# Altium PCB Layout.PcbDoc
Units mil, origin at the board's own origin, x right, y up, seen from the top; angles counter-clockwise.
Board outline 2700 x 2520 mil, 2 copper layers (Top Layer, Bottom Layer); 34 components, 28 nets, 132 pads, 10 vias.
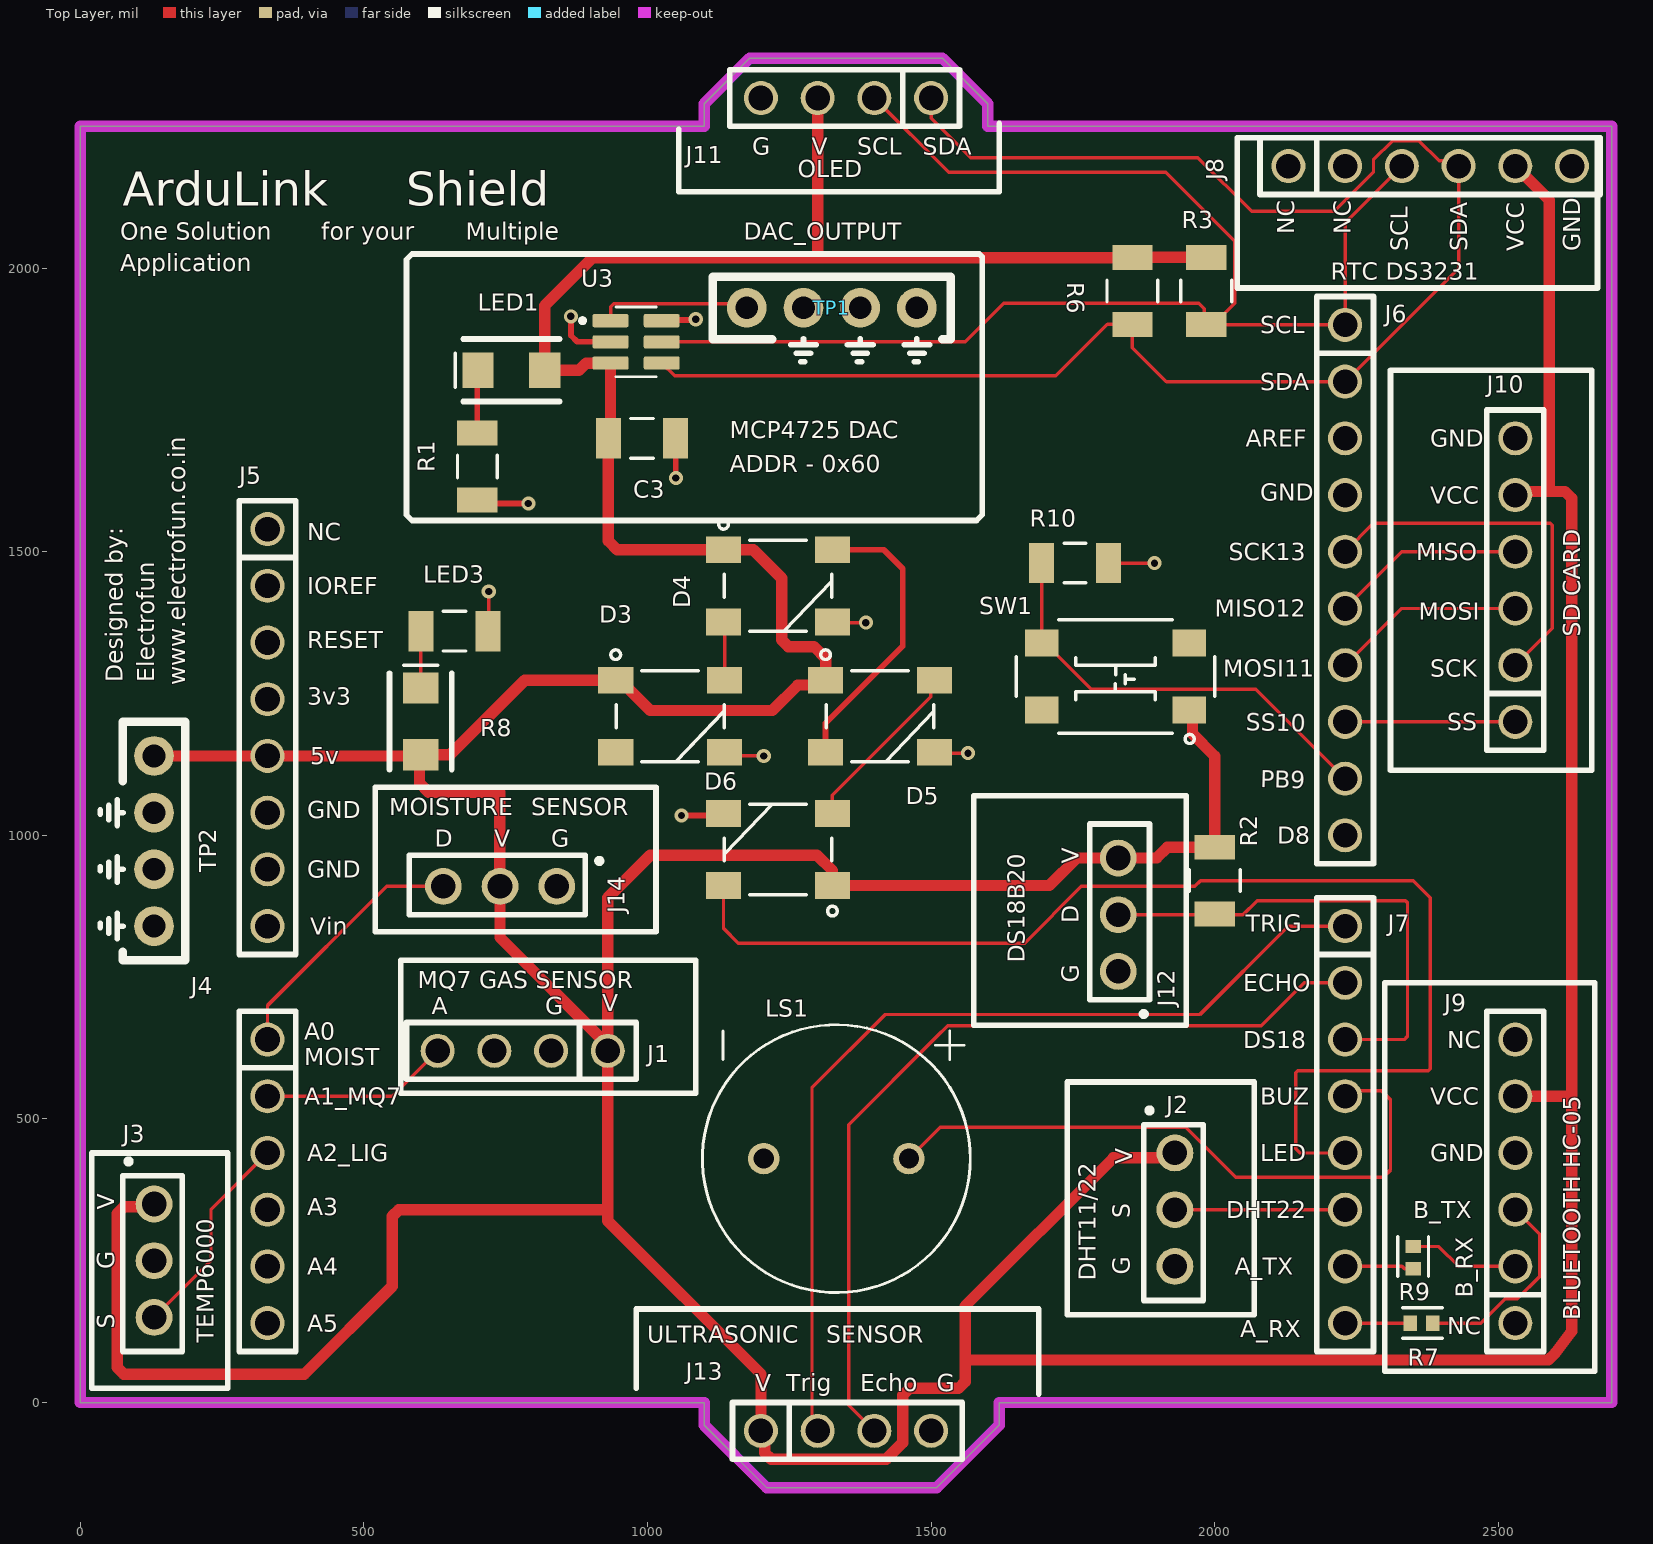
[diagram p0: Top Layer view]
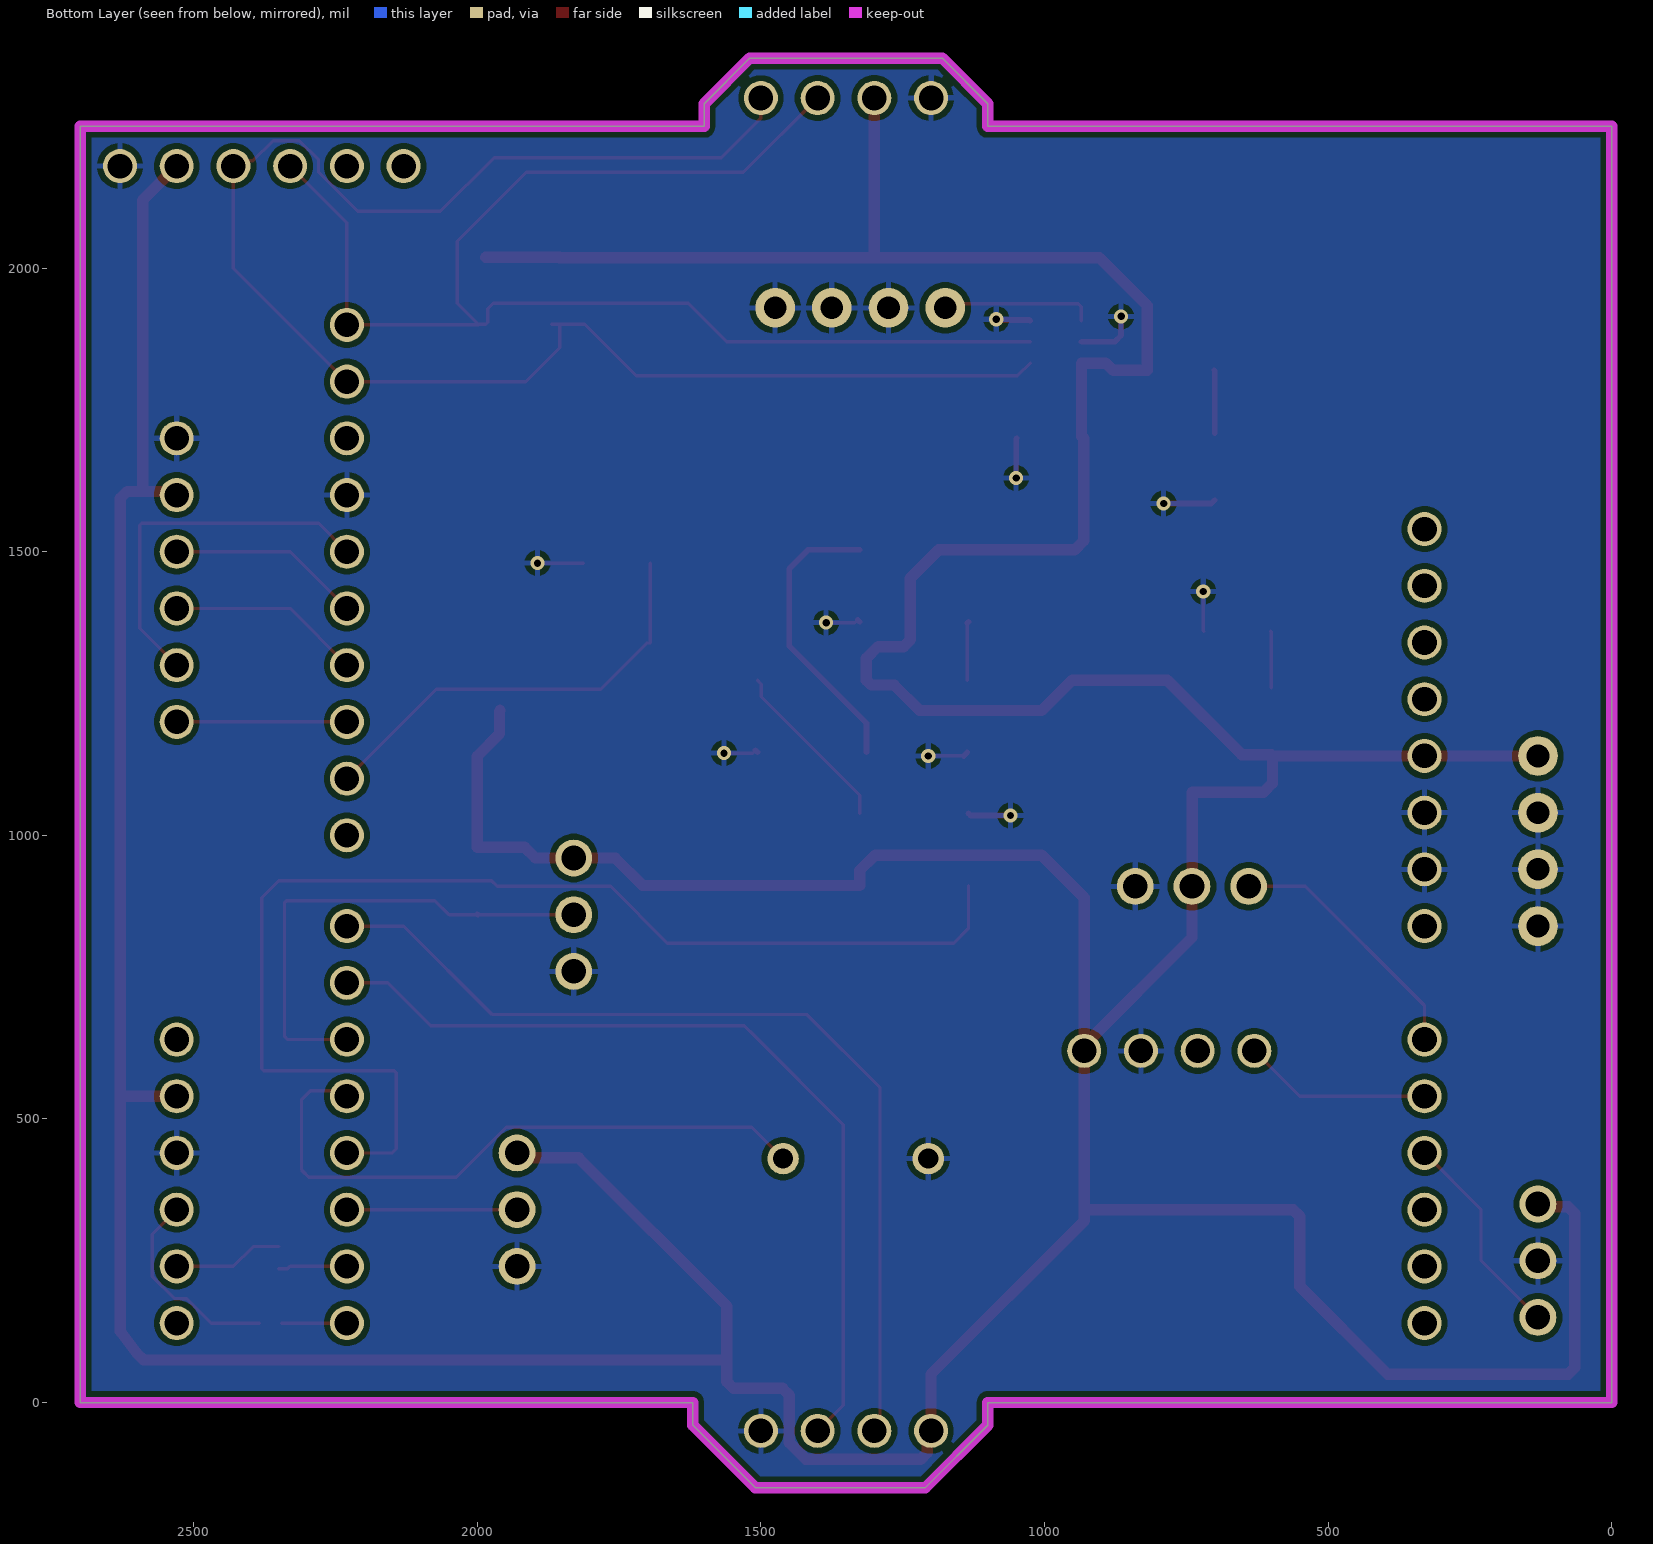
[diagram p1: Bottom Layer view, seen from below]
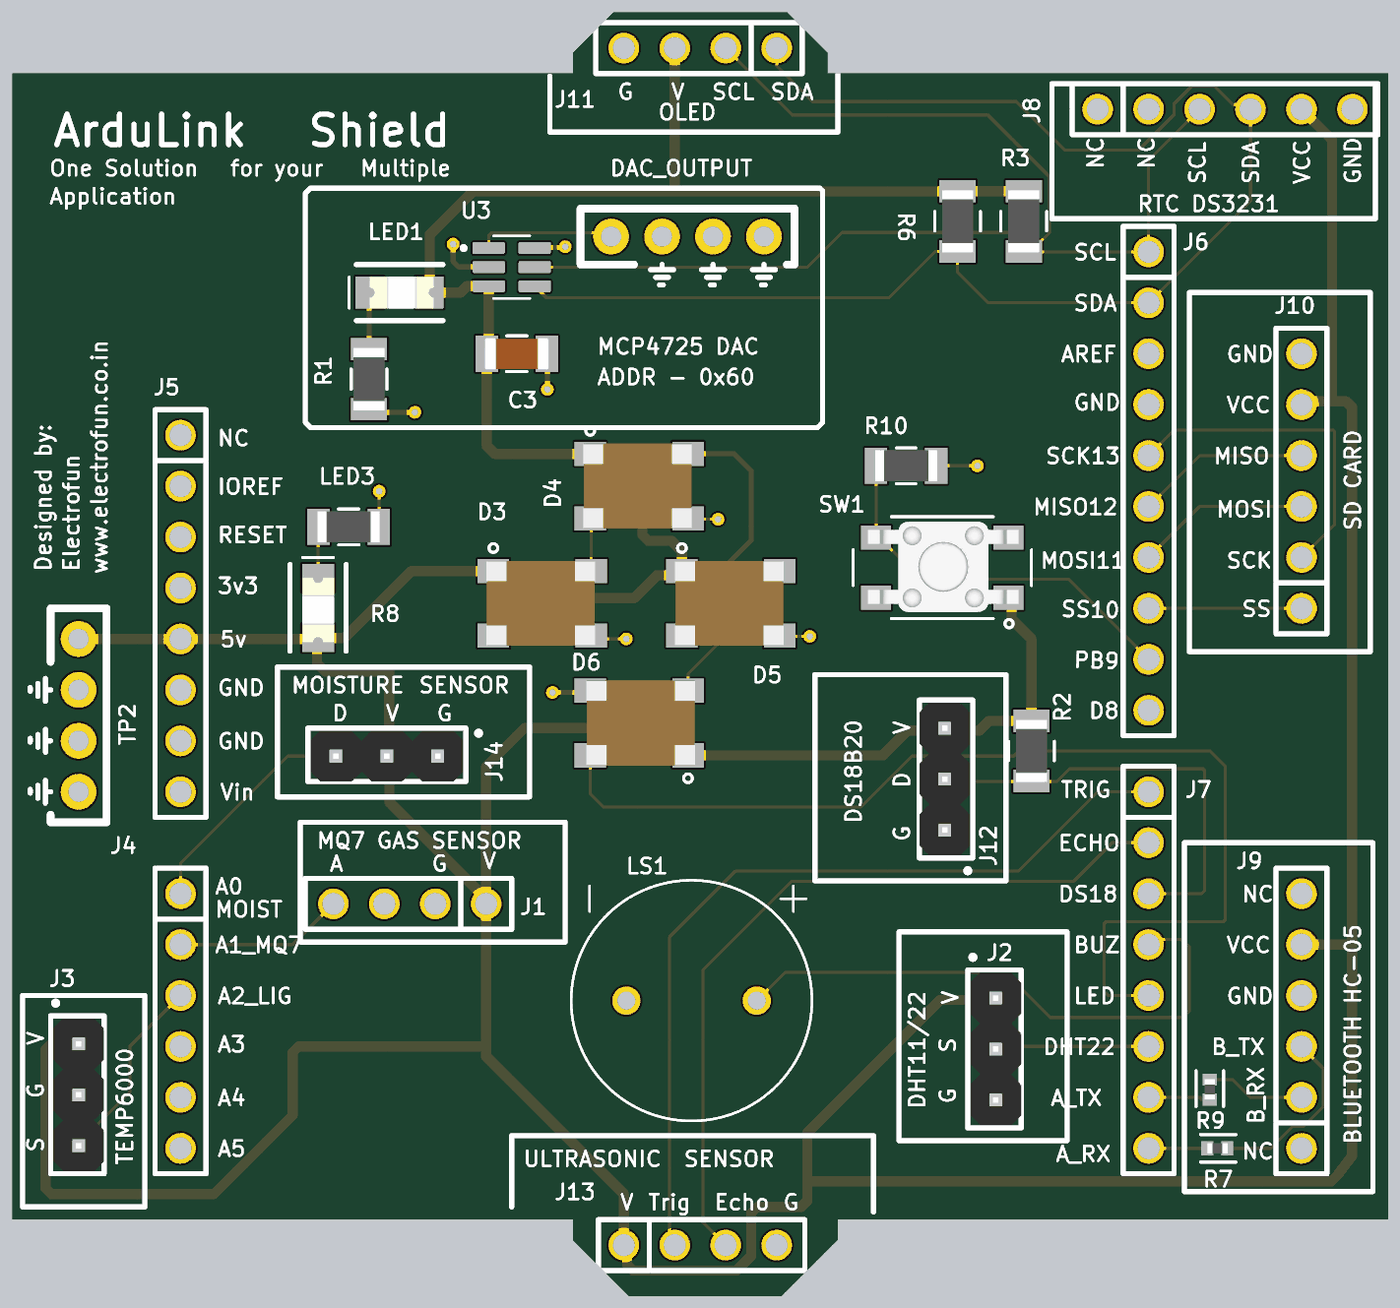
[diagram p2: 3D render of the assembled board from above, using the file's embedded part models]

## Layer stack, top to bottom
Top Solder: solder mask 0.4, Solder Resist, Dk 3.5
Top Layer: signal copper 1.4
Dielectric 1: dielectric 12.6, FR-4, Dk 4.8
Bottom Layer: signal copper 1.4
Bottom Solder: solder mask 0.4, Solder Resist, Dk 3.5

## Board outline
0,0 1100,0 1100,-40 1210,-150 1510,-150 1620,-40 1620,0 2700,0 2700,2250 1600,2250 1600,2290 1520,2370 1180,2370 1100,2290 1100,2250 0,2250

## Design rules (kind name [scope] priority, off if disabled: settings)
Clearance [All] p1: gap=10 ignorepadtopadclearanceinfootprint=FALSE ismatrix=TRUE
HoleToHoleClearance [All] p1: gap=6 allowstackedmicrovias=TRUE
MinimumSolderMaskSliver [All] p1: minsoldermaskwidth=6
PlaneClearance [All] p1: clearance=10
PolygonConnect [All] p1: connectstyle=Relief reliefconductorwidth=10 reliefentries=4 polygonreliefangle="90 Angle" airgapwidth=10
RoutingVias [All] p1: holewidth=28 width=50 viastyle="Through Hole" minholewidth=28 minwidth=50 maxholewidth=28 maxwidth=50
SilkToSilkClearance [All] p1: silktosilkclearance=6
SilkToSolderMaskClearance [IsPad] p1: minsilkscreentomaskgap=6 clearancetoexposedcopper=TRUE
SolderMaskExpansion [All] p1: expansion=4 istentingtop=FALSE
UnRoutedNet [All] p1: checkbadconnections=TRUE
Width MaxMinWidth_1 [All] p1: maxlimit=20 minlimit=6 preferedwidth=6 minimp=50.000000 maximp=50.000000 favimp=50.000000
Width "Power Trace" [VCC_5V] p2: maxlimit=100 minlimit=20 preferedwidth=20 minimp=50.000000 maximp=50.000000 favimp=50.000000
Width [All] p3: maxlimit=10 minlimit=10 preferedwidth=10
24 further rules are at their usual default settings.

## Components (designator, comment, footprint, x,y, rotation, side; value= is the part's Value field where it differs from the comment)
C3 "22uF" 1206_Passive_Capacitor 990,1700 r0 top
D3 "IN-PI55QATPRPGPBPW" SERIAL_LED 1040,1210 r0 top
D4 "IN-PI55QATPRPGPBPW" SERIAL_LED 1230,1440 r0 top
D5 "IN-PI55QATPRPGPBPW" SERIAL_LED 1410,1210 r0 top
D6 "IN-PI55QATPRPGPBPW" SERIAL_LED 1230,975 r180 top
J1 "J_4_PIN_HEADER" 4_PIN_100MIL 930,620 r180 top
J2 "3 PIN" 3_PIN_100mil 1930,440 r270 top
J3 "3 PIN" 3_PIN_100mil 130,350 r270 top locked
J4 "PPTC061LFBN-RC" 6_PIN_ARDUINO_100mil 330,640 r270 top locked value=Male
J5 "PPTC081LFBN-RC" 8_PIN_ARDUINO_100MIL 330,1540 r270 top locked value=Male
J6 "PPTC101LFBN-RC" 10_PIN_ARDUINO_100MIL 2230,1900 r270 top locked value=Male
J7 "PPTC081LFBN-RC" 8_PIN_ARDUINO_100MIL 2230,840 r270 top locked value=Male
J8 "PPTC061LFBN-RC" 6_PIN_ARDUINO_100mil 2130,2180 r0 top value=Male
J9 "PPTC061LFBN-RC" 6_PIN_ARDUINO_100mil 2530,140 r90 top locked value=Male
J10 "PPTC061LFBN-RC" 6_PIN_ARDUINO_100mil 2530,1200 r90 top locked value=Male
J11 "J_4_PIN_HEADER" 4_PIN_100MIL 1500,2300 r180 top
J12 "3 PIN" 3_PIN_100mil 1830,760 r90 top locked
J13 "J_4_PIN_HEADER" 4_PIN_100MIL 1200,-50 r0 top
J14 "3 PIN" 3_PIN_100mil 840,910 r180 top
LED1 "LTST-C150CKT" LED 760,1820 r90 top value=Red
LED3 "LTST-C150CKT" LED 600,1201 r0 top value=Red
LS1 "AT-1224-TWT-5V-2-R" XDCR_AT-1224-TWT-5V-2-R 1332.95,430 r270 top
R1 "1k" 1206_Passive_Resitor 700,1650 r270 top value="1K Ohm"
R2 "4.7KOhm" 1206_Passive_Resitor 2000,920 r90 top
R3 "4.7KOhm" 1206_Passive_Resitor 1985,1960 r270 top
R6 "4.7KOhm" 1206_Passive_Resitor 1855,1960 r270 top
R7 "0 Ohm" 0402_Passive_Resistor 2364.68,140 r0 top
R8 "1k" 1206_Passive_Resitor 660,1360 r0 top value="1K Ohm"
R9 "0 Ohm" 0402_Passive_Resistor 2350,255.31 r90 top
R10 "10k" 1206_Passive_Resitor 1754,1480 r0 top value=10KOhm
SW1 "TL3305AF160QG" Switch_JLC 1825,1280 r180 top
TP1 "10x Probe TP" TP10x_Probe 1325,1930 r0 top
TP2 "10x Probe TP" TP10x_Probe 130,990 r270 top
U3 "MCP4725A0T-E/CH" SOT95P270X145-6N 980,1870 r0 top

## Footprints (in the part's own frame and the unit in brackets; to place one, negate y for a bottom-side part, rotate by r counter-clockwise, add the part's x,y. Pads: shape width x height; smd on the part's side, far side on the other; paste and mask are expansions set on the pad)
3_PIN_100mil [mm]
  round 1.65 hole 1.1: 1(0,0) 2(2.54,0) 3(5.08,0)
  silkscreen extent -2,-1.4 6.6,1.27, body extent -1.14,-1.27 6.48,1.27, height 8.38
4_PIN_100MIL [mil]
  round 60 hole 43.31: 1(0,0) 2(100,0) 3(200,0) 4(300,0)
  silkscreen extent -50,-50 355,50
6_PIN_ARDUINO_100mil [mil]
  round 60 hole 43.31: 1(0,0) 2(100,0) 3(200,0) 4(300,0) 5(400,0) 6(500,0)
  silkscreen extent -50,-50 550,50
8_PIN_ARDUINO_100MIL [mil]
  round 60 hole 43.31: 1(0,0) 2(100,0) 3(200,0) 4(300,0) 5(400,0) 6(500,0) 7(600,0) 8(700,0)
  silkscreen extent -50,-50 750,50
10_PIN_ARDUINO_100MIL [mil]
  round 60 hole 43.31: 1(0,0) 2(100,0) 3(200,0) 4(300,0) 5(400,0) 6(500,0) 7(600,0) 8(700,0) 9(800,0) 10(900,0)
  silkscreen extent -50,-50 950,50
0402_Passive_Resistor [mm] "Reference: https://www.worthingtonassembly.com/perfect-0402-footprint"
  rect 0.6x0.7 smd mask+0: 1(-0.5,0) 2(0.5,0)
  silkscreen extent -0.84,-0.69 0.94,0.69, body extent -0.49,-0.25 0.51,0.25, height 0.4
1206_Passive_Capacitor [mil]
  rect 44x71 smd: 1(-59,0) 2(59,0)
  silkscreen extent -20,-35 20,35, body extent -63,-31 63,32, height 50
1206_Passive_Resitor [mil]
  rect 44x71 smd: 1(-59,0) 2(59,0)
  silkscreen extent -20,-35 20,35, body extent -61,-31 61,31, height 26
LED [mil]
  rect 63x55 smd: 1(0,59) 2(0,-59)
  silkscreen extent -55,-85 55,99, body extent -31,-67 32,59, height 43
SERIAL_LED [mil] "Footprint for serial LED"
  rect 62x47.5 smd: 1(-96,63.5) 2(-96,-63.5) 3(96,-63.5) 4(96,63.5)
  silkscreen extent -105,-80 95,117, body extent -109,-84 103,84, height 63
SOT95P270X145-6N [mm]
  rrect25% 1.61x0.59 smd: 1(-1.145,0.95) 2(-1.145,0) 3(-1.145,-0.95) 4(1.145,-0.95) 5(1.145,0) 6(1.145,0.95)
  silkscreen extent -2.5,-1.56 0.9,1.56
Switch_JLC [mm]
  rect 1.5x1.2 smd: 1(-3.3,1.5) 2(3.3,1.5) 3(-3.3,-1.5) 4(3.3,-1.5)
  silkscreen extent -4.44,-2.54 4.45,3, body extent -3.8,-2.29 3.7,2.21, height 3.7
TP10x_Probe [mil] "Small Probs footprint"
  round 70 hole 40: 1(-150,0) 2(-50,0) 2(50,0) 2(150,0)
  silkscreen extent -210,-95 210,55
XDCR_AT-1224-TWT-5V-2-R [mm]
  round 1.408 hole 0.9: N(0,-3.25) P(0,3.25)
  silkscreen extent -6,-6 6,6

## Part data
C3: library part C_22uF_1206, "22µF ±20% 16V Ceramic Capacitor X5R 1206 (3216 Metric)", LCSC Part#=C12891, MFR Part #=CL31A226KPHNNNE, Digikey Link=https://www.digikey.com/product-detail/en/CL31A226MOCLNNC/1276-2728-1-ND/3890814/?itemSeq=304982363, Digikey Part=1276-2728-1-ND, Type=Extended
D3 D4 D5: library part LED_Smart_5050, "Digital Series Cascade LED", DigiKey=https://www.digikey.com/product-detail/en/inolux/IN-PI55QATPRPGPBPW-60/1830-1209-1-ND/9681289
D6: library part LED_Smart_5050, "Digital Series Cascade LED", LCSC Part#=C2843785, DigiKey=https://www.digikey.com/product-detail/en/inolux/IN-PI55QATPRPGPBPW-60/1830-1209-1-ND/9681289
J1 J11 J13: "4 Position Header Connector 0.100\" (2.54mm) Through Hole Tin"
J2 J3 J12 J14: library part J_3_PIN_HEADER, "3 2.54mm Straight 1 Header，Breakaway Through Hole Pin Header & Female Header ROHS", LCSC Part#=C49257, Datasheet=https://datasheet.lcsc.com/lcsc/1811132313_BOOMELE-Boom-Precision-Elec-C49257_C49257.pdf, MFR Part #=C49257, Type=Extended
J4 J8 J9 J10: library part JM_6_PIN_MALE_ARDUINO, "6 Position Header Connector 0.100\" (2.54mm) Through Hole Tin", LCSC Part#=DNP, Digikey Link=https://www.digikey.com/product-detail/en/PPTC061LFBN-RC/S7004-ND/810145/?itemSeq=304982353, Digikey Part=S7004-ND
J5 J7: library part JM_8_PIN_MALE_ARDUINO, "8 Position Header Connector 0.100\" (2.54mm) Through Hole Tin", LCSC Part#=DNP, Digikey Link=https://www.digikey.com/product-detail/en/PPTC081LFBN-RC/S7006-ND/810147/?itemSeq=304982354, Digikey Part=S7006-ND
J6: library part JM_10_PIN_MALE_ARDUINO, "10 Position Header Connector 0.100\" (2.54mm) Through Hole Tin", LCSC Part#=DNP, Digikey Link=https://www.digikey.com/product-detail/en/PPTC101LFBN-RC/S7008-ND/810149/?itemSeq=304982352, Digikey Part=S7008-ND
LED1 LED3: library part LED_1206, "Red 638nm LED Indication - Discrete 1.8V 1206 (3216 Metric)", LCSC Part#=C93133, Digikey Link=https://www.digikey.com/product-detail/en/LTST-C150CKT/160-1167-1-ND/269239/?itemSeq=304982368, Digikey Part=160-1167-1-ND
LS1: "AUDIO TRANSDUCER 5 VP-P 87 DB 2400 HZ", LCSC Part#=C417411, Package="PUI Audio,", Availability="In Stock", Check_prices=https://www.snapeda.com/parts/AT-1224-TWT-5V-2-R/PUI%20Audio,%20Inc./view-part/453710/?ref=eda, MF="PUI Audio,", MP=AT-1224-TWT-5V-2-R, Price=None, Purchase-URL=https://pricing.snapeda.com/search/part/AT-1224-TWT-5V-2-R/?ref=eda, SnapEDA_Link=https://www.snapeda.com/parts/AT-1224-TWT-5V-2-R/PUI%20Audio,%20Inc./view-part/453710/?ref=snap
R1 R8: library part R_1K_1206, "1 kOhms ±1% 0.5W, 1/2W Chip Resistor 1206 (3216 Metric) Anti-Sulfur, Moisture Resistant Thin Film", LCSC Part#=C4410, MFR Part #=1206W4F1001T5, Digikey Link=https://www.digikey.com/product-detail/en/RNCP1206FTD1K00/RNCP1206FTD1K00CT-ND/2240675/?itemSeq=304982373, Digikey Part=RNCP1206FTD1K00CT-ND
R2 R3 R6: library part R_4.7k_1206, "4.7kΩ ±1% 0.25W ±100ppm/℃ 1206 Chip Resistor - Surface Mount RoHS", LCSC Part#=C17936, MFR Part #=1206W4F4701T5E, Datasheet=https://datasheet.lcsc.com/lcsc/1810301414_UNI-ROYAL-Uniroyal-Elec-1206W4F4701T5E_C17936.pdf, Type=Basic
R7 R9: library part R_0Ohm_0402, "CHIP RESISTOR - SURFACE MOUNT 0OHMS ±1% 1/16W 0402 ROHS", LCSC Part#=C17168, MFR Part #=0402WGF0000TCE, Datasheet=https://datasheet.lcsc.com/szlcsc/Uniroyal-Elec-0402WGF0000TCE_C17168.pdf, Type=Basic
R10: library part R_10KOhm_1206, "10 kOhms ±5% 0.25W, 1/4W Chip Resistor 1206 (3216 Metric) Automotive AEC-Q200 Thick Film", LCSC Part#=C17902, Digikey Link=https://www.digikey.com/product-detail/en/RMCF1206JT300R/RMCF1206JT300RCT-ND/1942776/?itemSeq=304982374, Digikey Part=RMCF1206JT300RCT-ND, Type=Basic
SW1: library part SW_Push_Button_JLC, "Tactile Switch SPST-NO Top Actuated Surface Mount", LCSC Part#=C2837550, MFR Part #=KH-4.5X4.5X4.3H-STM, Datasheet=https://datasheet.lcsc.com/lcsc/2106081532_Shenzhen-Kinghelm-Elec-KH-4.5X4.5X4.3H-STM_C2837550.pdf, Type=Extended
TP1 TP2: library part TP_10x_Probe, "Test Point 300 mil centers"
U3: "12 Bit Digital to Analog Converter 1 SOT-23-6", LCSC Part#=C144198, Package="SOT-23-6 Microchip", Availability=Unavailable, MF=Microchip, MP=MCP4725A0T-E/CH, Price=None, SnapEDA_Link=https://www.snapeda.com/parts/MCP4725A0T-E/CH/Microchip/view-part/109888/?ref=snap

## Via types
v1: diameter 25, hole 13, Top Layer to Bottom Layer, 10 vias

## Nets (pads, with @x,y where several pads share a name; then routed paths per layer and width w, separated by ;. In a path a pad name is that pad's centre, name@x,y a point inside that pad or via, vN(x,y) a via of type N, cw(c..) or ccw(c..) an arc to the next point about the centre after c; other vN are vias at no path point)
A_RX: J7.8 R7.1 | length 115
  Top Layer w6: J7.8 R7.1
A_TX: J7.7 R9.1 | length 121.8
  Top Layer w6: J7.7 2330.32,240 2334.69,235.63 R9.1
AM_LIGHT: J3.3 J4.3 | length 372.8
  Top Layer w6: J3.3 230.47,250.47 230.47,340.47 J4.3
BT_RX: J9.2 R9.2 | length 194.5
  Top Layer w6: R9.2 2395,275 2430,240 J9.2
BT_TX: J9.3 R7.2 | length 358.3
  Top Layer w6: R7.2 2469.19,140 2512.19,183 2533.81,183 2573,222.19 2573,297 J9.3
BUZ_PWM: J7.4 LS1.P | length 1129
  Top Layer w6: LS1.P 1516.39,485.48 1948.84,485.48 2037.32,397 2297,397 2310,410 2310,534.14 2294.14,550 2240,550 J7.4
D10_SS: J6.8 J10.1 | length 300
  Top Layer w6: J6.8 J10.1
D11_MOSI: J6.7 J10.3 | length 341.4
  Top Layer w6: J6.7 2330,1400 J10.3
D12_MISO: J6.6 J10.4 | length 341.4
  Top Layer w6: J6.6 2330,1500 J10.4
D13_SCK: J6.5 J10.2 | length 660.6
  Top Layer w6: J6.5 2280,1550 2591.49,1550 2595,1546.49 2595,1365 J10.2
DAC_OP_A0: TP1.1 U3.1 | length 269.9
  Top Layer w6: U3.1 934.92,1931.64 940.78,1937.5 1167.5,1937.5 TP1.1
DS18_DATA: J7.3 J12.2 R2.1 | length 871.3
  Top Layer w6: J12.2 1999,860 2050,860 2075,885 2336.49,885 2340,881.49 2340,645.86 2334.14,640 J7.3
  Top Layer w10: R2.1@1999,860 R2.1
ECHO: J7.2 J13.3 | length 1537.2
  Top Layer w6: J13.3 1355,-5 1355,490 1509.58,644.58 1529.14,664.14 2082.43,664.14 2158.28,740 J7.2
GAS_AO: J1.4 J4.2 | length 333.1
  Top Layer w6: J4.2 550,540 J1.4
GND: C3.2 D3.3 D4.3 D5.3 D6.3 J1.2 J2.3 J3.2 J5.6 J5.7 J6.4 J8.6 J9.4 J10.6 J11.4 J12.1 J13.4 J14.1 LS1.N R1.2 R8.2 R10.2 TP1.2 TP2.2 U3.2 U3.6 | length 755.7
  Top Layer w6: R8.2 720,1361 v1(720,1430) ; D3.3@1142.5,1140 v1(1205,1140) ; D4.3@1329.5,1380 1334.5,1375 v1(1385,1375) ; D5.3@1509.5,1150 1514.5,1145 v1(1565,1145) ; R10.2 v1(1894,1480)
  Top Layer w10: R1.2 706,1585 v1(790,1585) ; v1(865,1915) 865,1881.41 876.14,1870.28 934.64,1870.28 U3.2 ; U3.6 1026.38,1908.7 1083.7,1908.7 v1(1085,1910) ; C3.2 1050,1699 v1(1050,1630) ; v1(1060,1035) 1130.5,1035 D6.3 ; D3.3 D3.3@1142.5,1140 ; D4.3 D4.3@1329.5,1380 ; D5.3 D5.3@1509.5,1150
LED's: D6.4 J7.5 | length 2156.2
  Top Layer w6: D6.4 1134,836 1160,810 1665,810 1765,910 1965,910 1975,920 2350,920 2380,890 2380,588.51 2376.49,585 2146.38,585 2142.86,581.49 2142.86,447.14 2150,440 J7.5
MOIST_DATA: J4.1 J14.3 | length 457
  Top Layer w6: J4.1 330,700 540,910 J14.3
NetD3_4: D3.4 D4.2 | length 103.8
  Top Layer w6: D3.4 D4.2@1136,1374.5
  Top Layer w10: D4.2 D4.2@1136,1374.5
NetD4_4: D4.4 D5.2 | length 517.7
  Top Layer w10: D5.2 1314,1197.54 1450,1333.54 1450,1470 1416.5,1503.5 D4.4
NetD5_4: D5.4 D6.2 | length 309.6
  Top Layer w6: D6.2 1326,1071 1499.26,1244.26 1499.26,1266.76 D5.4
NetLED1_1: LED1.1 R1.1 | length 111.4
  Top Layer w10: R1.1 700,1819 LED1.1
NetLED3_1: LED3.1 R8.1 | length 100.4
  Top Layer w6: LED3.1 600,1359 R8.1
PB: J6.9 R10.1 SW1.4 | length 774.9
  Top Layer w6: R10.1 1695.08,1479.92 SW1.4 1700.98,1339.05 1782.47,1257.57 2072.43,1257.57 J6.9
SCL: J6.1 J8.3 J11.2 R3.2 U3.5 | length 2485.6
  Top Layer w6: U3.5 1560,1870 1628,1938 1972,1938 1981.51,1928.49 1981.51,1904.49 R3.2 1998.5,1901 2035.5,1938 2035.5,2047.21 1913.89,2168.82 1531.18,2168.82 J11.2 ; R3.2@1998.5,1900 J6.1 2230,2080 J8.3
SDA: J6.2 J8.4 J11.1 R6.2 U3.4 | length 2910.6
  Top Layer w6: U3.4 1047.68,1810 1720,1810 1811,1901 R6.2 ; J11.1 1500.49,2299.51 1500.49,2264.51 1570,2195 1970,2195 2065,2100 2210.81,2100 2280,2169.19 2280,2190.81 2314.19,2225 2360,2225 2395.92,2189.08 2420.92,2189.08 J8.4 2430,2000 J6.2 1915,1800 1855,1860 R6.2 ; R6.2@1868.5,1901 R6.2
TEMP_DATA: J2.2 J7.6 | length 300
  Top Layer w6: J2.2 J7.6
TRIG: J7.1 J13.2 | length 1667.2
  Top Layer w6: J13.2 1290,-40 1290,555 1419.14,684.14 1974.14,684.14 2130,840 J7.1
VCC_5V: C3.1 D3.1 D4.1 D5.1 D6.1 J1.1 J2.1 J3.1 J5.5 J8.5 J9.5 J10.5 J11.3 J12.3 J13.1 J14.2 LED1.2 LED3.2 R2.2 R3.1 R6.1 SW1.1 TP2.1 U3.3 | length 12981
  Top Layer w20: J3.1 124.92,344.92 76.72,344.92 65,333.21 65,61.72 76.72,50 395,50 550,205 550,328.28 561.72,340 925,340 ; TP2.1 J5.5 LED3.2@598,1140 ; J14.2@739.33,910.67 739.33,1076.08 613.92,1076.08 598,1092 LED3.2@598,1140 ; J14.2 740,820 J1.1@930,630 ; J1.1@922.35,612.35 J1.1 ; J11.3 1300,2018.54 ; R6.1@1854.54,2018.54 1300,2018.54 ; R6.1 R3.1 ; J2.1 1921.4,431.4 1821.4,431.4 1560,170 1560,80 ; SW1.1@1959.92,1220.94 1959.92,1220 1960.96,1218.96 1960.96,1179.04 2000,1140 R2.2 1916.69,979 1897.69,960 J12.3 1757,960 1708.5,911.5 D6.1 1326,937.89 1298.89,965 1005,965 930,890 J1.1@930,630 ; J9.5 2625,540 ; J10.5 2536.25,1606.25 2590,1606.25 ; J8.5 2590,2120 2590,1606.25 ; LED3.2@598,1140 LED3.2 652,1142 783.5,1273.5 D3.1 951.25,1273.5 1004.75,1220 1220,1220 1265.16,1265.16 1305.66,1265.16 D5.1 1314,1312.25 1293.5,1332.75 1248.32,1332.75 1236.61,1344.47 1236.61,1453.39 1186.5,1503.5 D4.1 946.5,1503.5 931,1519 C3.1 934.92,1703.92 U3.3 891.96,1832.6 879.36,1820 LED1.2 819,1934 903.54,2018.54 1300,2018.54 ; J1.1 930,320 1200,50 J13.1 1206.57,-56.57 1206.57,-88.28 1218.28,-100 1420.71,-100 1450,-70.71 1450,13.28 1461.72,25 1548.28,25 1560,36.72 1560,80 ; J1.1 J1.1@930,630 ; 1560,80 1565,75 2588.28,75 2600,86.72 2629.38,125.39 2629.38,1594.53 2617.67,1606.25 2590,1606.25
pads on no net: D3.2 J1.3 J4.4 J4.5 J4.6 J5.1 J5.2 J5.3 J5.4 J5.8 J6.3 J6.10 J8.1 J8.2 J9.1 J9.6 SW1.2 SW1.3

## Polygon pours and split planes (outlines as drawn)
GND on Bottom Layer "NONET_L-01_P-001" (solid, pour order 1): 0,0 1100,0 1100,-40 1210,-150 1510,-150 1620,-40 1620,0 2700,0 2700,2250 1600,2250 1600,2290 1590,2300 1520,2370 1180,2370 1100,2290 1100,2250 0,2250

## Keep-outs
Keep-Out Layer:
  the board outline again, w20

## Silkscreen, mask and mechanical layers (free items; w line width, h text height)
Top Overlay:
  lines w10: 980,25 980,165 1690,165 1690,15 ; 1055,2245 1055,2135 1620,2135 1620,2255 ; 20,25 260,25 260,440 20,440 20,25 ; 520,830 1015,830 1015,1085 520,1085 520,830 ; 565,545 1085,545 1085,780 565,780 565,545 ; 575,1565 585,1555 1580,1555 1590,1565 1590,2020 1585,2025 585,2025 575,2015 575,1565 ; 1575,665 1950,665 1950,1070 1575,1070 1575,665 ; 1740,155 2070,155 2070,565 1740,565 1740,155 ; 2040,1965 2675,1965 2675,2230 2040,2230 2040,1965 ; 2300,55 2670,55 2670,740 2300,740 2300,55 ; 2310,1115 2665,1115 2665,1820 2310,1820 2310,1115
  text "G" at 1185,2200 h30
  text "V" at 1290,2200 h30
  text "SCL" at 1370,2200 h30
  text "SDA" at 1485,2200 h30
  text "OLED" at 1265,2160 h30
  text "ArduLink" at 75,2110 h60
  text "Shield" at 575,2110 h60
  text "One Solution" at 70,2050 h30
  text "for your" at 425,2050 h30
  text "Multiple" at 680,2050 h30
  text "DAC_OUTPUT" at 1170,2050 h30
  text "Application" at 70,1995 h30
  text "RTC DS3231" at 2205,1980 h30
  text "MCP4725 DAC" at 1145,1700 h30
  text "ADDR - 0x60" at 1145,1640 h30
  text "SD CARD" at 2645,1350 h30 r90
  text "Designed by:" at 75,1270 h30 r90
  text "Electrofun" at 130,1270 h30 r90
  text "www.electrofun.co.in" at 185,1265 h30 r90
  text "MOISTURE" at 545,1035 h30
  text "SENSOR" at 795,1035 h30
  text "D" at 625,980 h30
  text "V" at 730,980 h30
  text "G" at 830,980 h30
  text "V" at 1760,950 h30 r90
  text "D" at 1760,845 h30 r90
  text "DS18B20" at 1665,775 h30 r90
  text "G" at 1760,740 h30 r90
  text "MQ7 GAS SENSOR" at 595,730 h30
  text "V" at 920,690 h30
  text "A" at 620,685 h30
  text "G" at 820,685 h30
  text "MOIST" at 395,595 h30
  text "V" at 1855,420 h30 r90
  text "V" at 60,340 h30 r90
  text "S" at 1850,325 h30 r90
  text "G" at 60,235 h30 r90
  text "G" at 1850,225 h30 r90
  text "DHT11/22" at 1790,215 h30 r90
  text "BLUETOOTH HC-05" at 2645,145 h30 r90
  text "S" at 60,130 h30 r90
  text "TEMP6000" at 235,105 h30 r90
  text "ULTRASONIC" at 1000,105 h30
  text "SENSOR" at 1315,105 h30
  text "V" at 1190,20 h30
  text "Trig" at 1245,20 h30
  text "Echo" at 1375,20 h30
  text "G" at 1510,20 h30

## Text inside footprints (layer, text, board x,y; h text height)
J4: Top Overlay "A5" at 400,125 h30; Top Overlay "A4" at 400,225 h30; Top Overlay "A3" at 400,330 h30; Top Overlay "A2_LIG" at 400,425 h30; Top Overlay "A0" at 395,640 h30; Top Overlay "A1_MQ7" at 395,525 h30
J5: Top Overlay "Vin" at 405,825 h30; Top Overlay "GND" at 400,925 h30; Top Overlay "GND" at 400,1030 h30; Top Overlay "5v" at 405,1125 h30; Top Overlay "3v3" at 400,1230 h30; Top Overlay "RESET" at 400,1330 h30; Top Overlay "IOREF" at 400,1425 h30; Top Overlay "NC" at 400,1520 h30
J6: Top Overlay "SCL" at 2080,1885 h30; Top Overlay "SDA" at 2080,1785 h30; Top Overlay "AREF" at 2055,1685 h30; Top Overlay "GND" at 2080,1590 h30; Top Overlay "SCK13" at 2025,1485 h30; Top Overlay "MISO12" at 2000,1385 h30; Top Overlay "MOSI11" at 2015,1280 h30; Top Overlay "SS10" at 2055,1185 h30 r358.68; Top Overlay "PB9" at 2080,1085 h30 r358.5; Top Overlay "D8" at 2110,985 h30
J7: Top Overlay "TRIG" at 2055,830 h30; Top Overlay "ECHO" at 2050,725 h30; Top Overlay "DS18" at 2050,625 h30; Top Overlay "BUZ" at 2080,525 h30; Top Overlay "LED" at 2080,425 h30; Top Overlay "DHT22" at 2020,325 h30; Top Overlay "A_TX" at 2035,225 h30; Top Overlay "A_RX" at 2045,115 h30
J8: Top Overlay "NC" at 2240,2060 h30 r90; Top Overlay "NC" at 2140,2060 h30 r90; Top Overlay "SCL" at 2340,2030 h30 r90; Top Overlay "SDA" at 2445,2030 h30 r90; Top Overlay "VCC" at 2545,2030 h30 r90; Top Overlay "GND" at 2645,2030 h30 r90
J9: Top Overlay "B_RX" at 2455,185 h30 r90; Top Overlay "NC" at 2410,120 h30; Top Overlay "B_TX" at 2350,325 h30; Top Overlay "GND" at 2380,425 h30; Top Overlay "VCC" at 2380,525 h30; Top Overlay "NC" at 2410,625 h30
J10: Top Overlay "GND" at 2380,1685 h30; Top Overlay "VCC" at 2380,1585 h30; Top Overlay "MISO" at 2355,1485 h30; Top Overlay "MOSI" at 2360,1380 h30; Top Overlay "SS" at 2410,1185 h30; Top Overlay "SCK" at 2380,1280 h30